# Altium PCB Доска.PcbDoc
Units mm, origin at the board's own origin, x right, y up, seen from the top; angles counter-clockwise.
Board outline 100 x 75.25 mm, 2 copper layers (Top Layer, Bottom Layer); 23 components, 17 nets, 145 pads, 0 vias.
Unrouted connection lines stored in the file: 31.
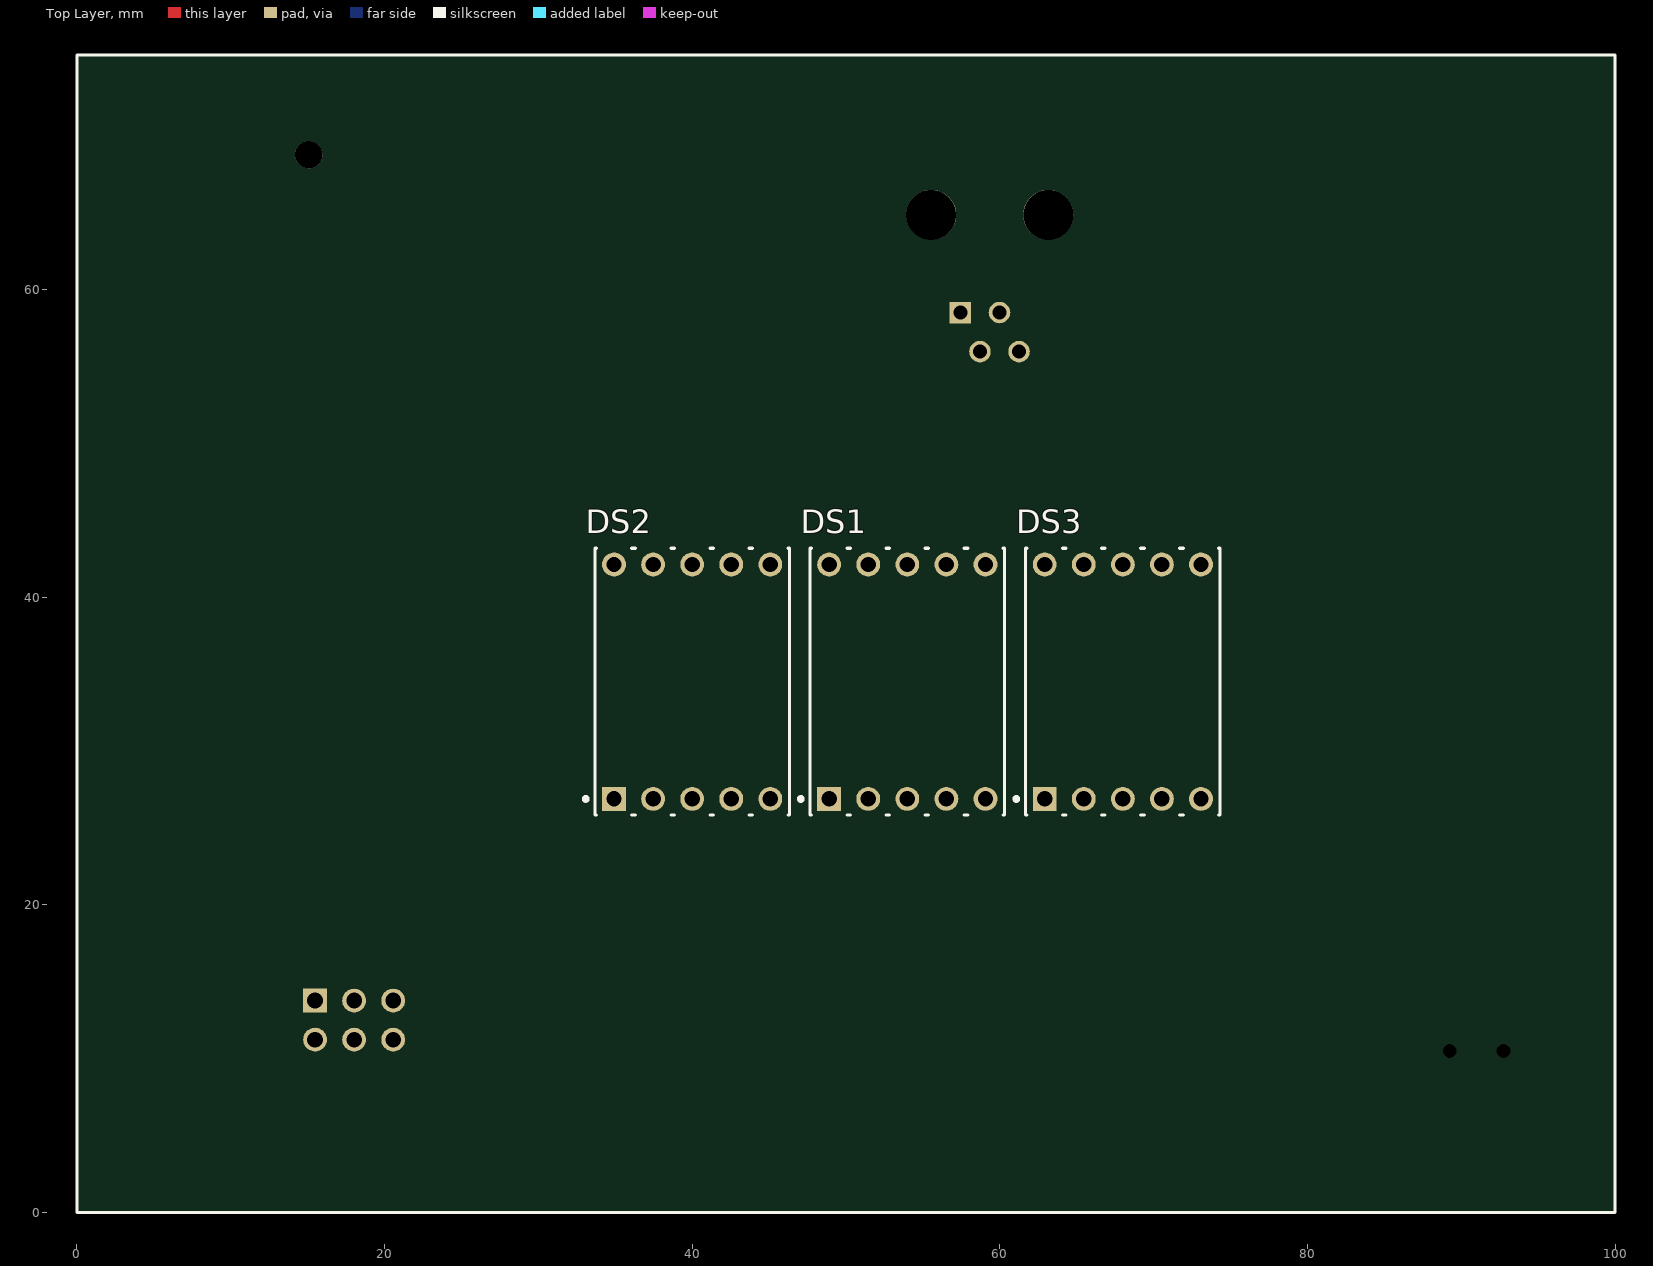
[diagram p0: Top Layer view]
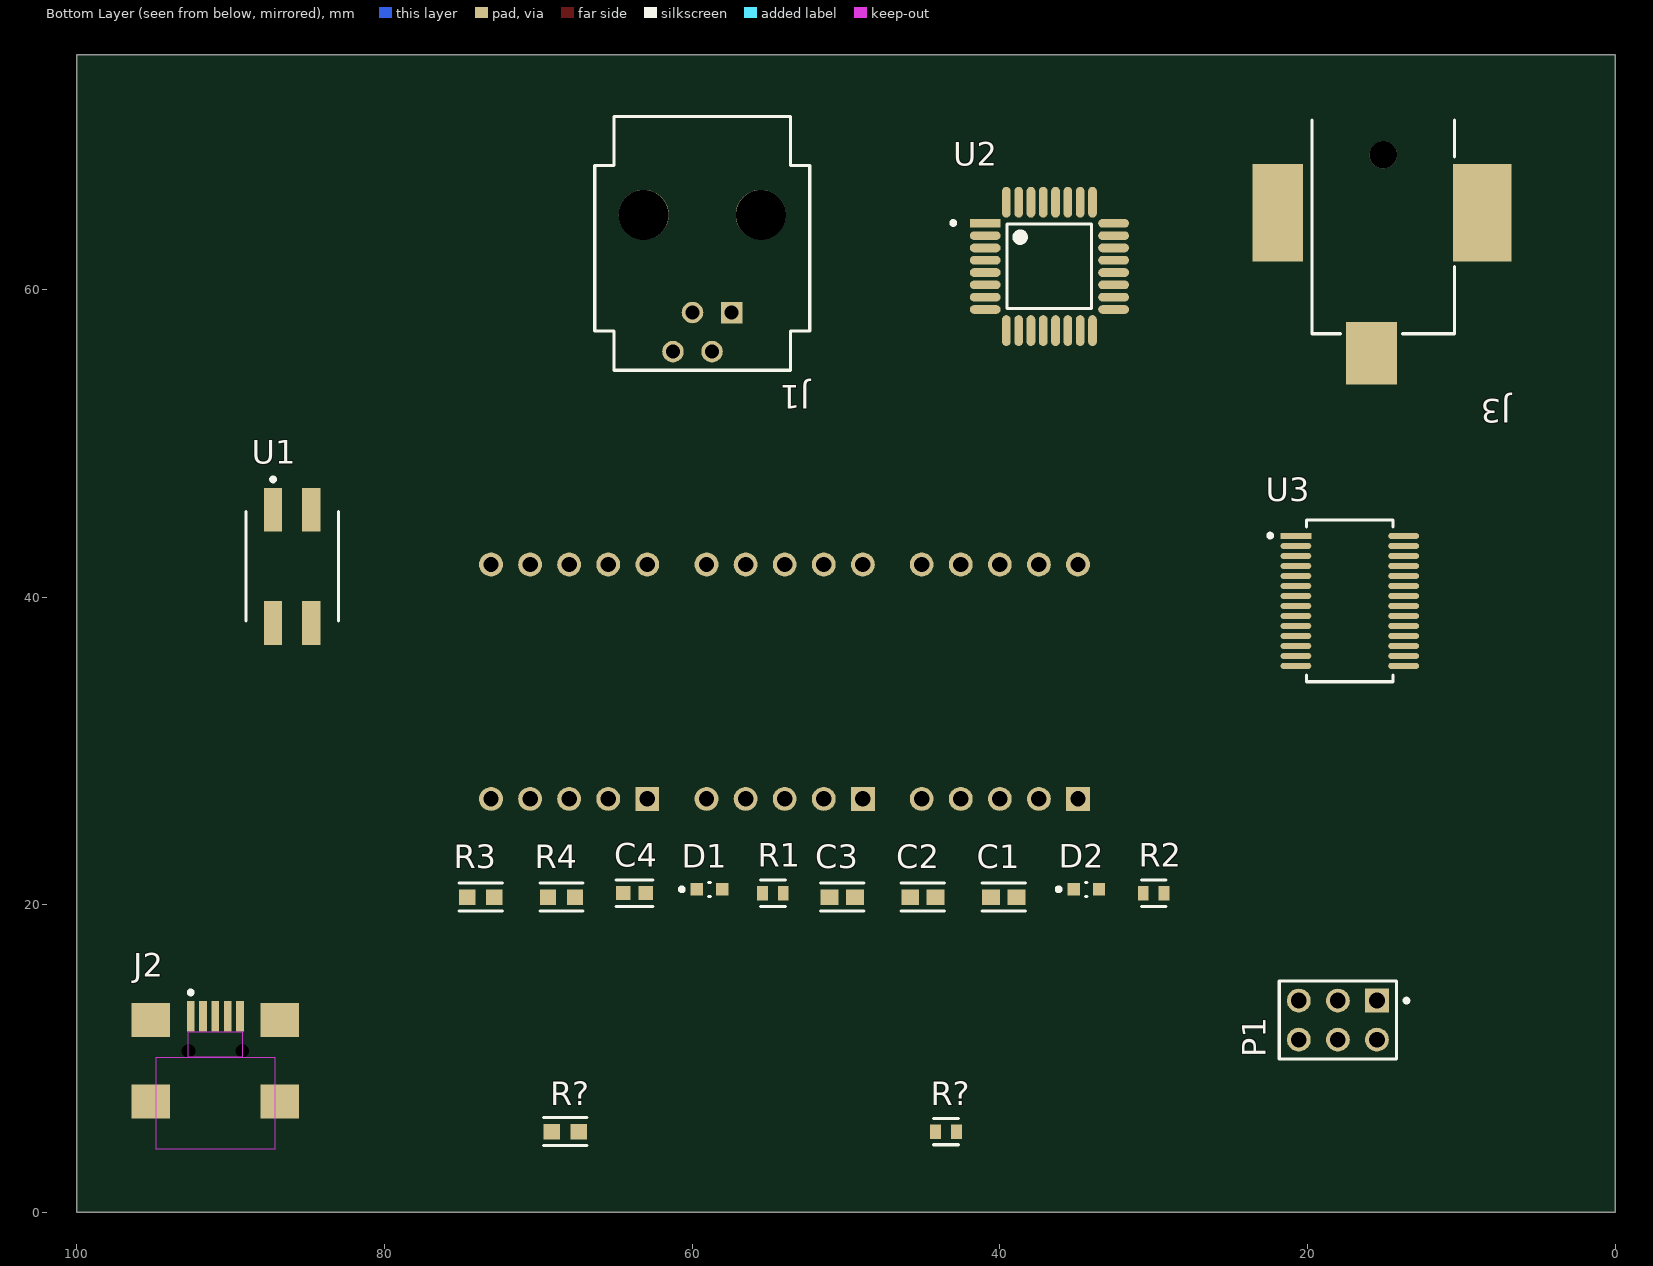
[diagram p1: Bottom Layer view, seen from below]

## Layer stack, top to bottom
Top Solder: solder mask 0.0102, Solder Resist, Dk 3.5
Top Layer: signal copper 0.0356
Dielectric 1: dielectric 0.32, FR-4, Dk 4.8
Bottom Layer: signal copper 0.0356
Bottom Solder: solder mask 0.0102, Solder Resist, Dk 3.5

## Board outline
0,0 0,75.25 100,75.25 100,0

## Design rules (kind name [scope] priority, off if disabled: settings)
Clearance [All] p1: gap=0.254 ignorepadtopadclearanceinfootprint=FALSE except(0: Arc-Hole Track-Hole SMDPad-Hole THPad-Hole Via-Hole Fill-Hole Poly-Hole Region-Hole Text-Hole)
ComponentClearance [All] p1: gap=0.1 collisioncheckmode=3 verticalgap=2540 showdistances=TRUE
PolygonConnect [All] p1: connectstyle=Relief reliefconductorwidth=0.254 reliefentries=4 polygonreliefangle="90 Angle" airgapwidth=0.254
RoutingVias [All] p1: holewidth=0.711 width=1.27 viastyle="Through Hole" minholewidth=0.711 minwidth=1.27 maxholewidth=0.711 maxwidth=1.27
SilkToSilkClearance [All] p1: silktosilkclearance=0.1
SolderMaskExpansion [All] p1: expansion=0.102 istentingtop=FALSE
Width [All] p1: maxlimit=0.254 minlimit=0.254 preferedwidth=0.254
28 further rules are at their usual default settings.

## Classes and differential pairs
component class Блок7: DS3
component class Блок6: DS2
component class Блок5: DS1
component class Блок3: U2
component class Блок2: U1
component class Архитектура: J1 J2 J3 P1
component class Блок1: C1 C2 C3 C4 D1 D2 R1 R2 R3 R4 R? U3

## Components (designator, comment, footprint, x,y, rotation, side; value= is the part's Value field where it differs from the comment)
C1 "CL10B225KP8NFNC" FP-CL10-IPC_A 39.75,20.5 r180 bottom
C2 "CL10B225KP8NFNC" FP-CL10-IPC_A 45,20.5 r180 bottom
C3 "CL10B225KP8NFNC" FP-CL10-IPC_A 50.25,20.5 r180 bottom
C4 "CL10B104JO8NNND" FP-CL10-IPC_B 63.75,20.75 r180 bottom
D1 "APT1608ZGCK" FP-APT1608ZGCK-MFG 58.875,21 r180 bottom
D2 "APT1608ZGCK" FP-APT1608ZGCK-MFG 34.375,21 r180 bottom
DS1 "LSHD-5601" FP-LSHD-5601-MFG 53.986,34.5 r0 top
DS2 "LSHD-5601" FP-LSHD-5601-MFG 40,34.5 r0 top
DS3 "LSHD-5601" FP-LSHD-5601-MFG 67.997,34.5 r0 top
J1 "615004144021" 615004144021 59.345,63 r0 bottom
J2 "UX60-MB-5ST" HIRO-UX60-MB-5ST_V 91,10.5 r180 bottom
J3 "RASM722PTR13X" FP-RASM722PTR13X-MFG 15.075,64.5 r0 bottom
P1 "TSW-103-08-L-D" SMTC-TSW-103-08-L-D_V 18.025,12.5 r0 bottom
R1 "MCT06030C4701FP500" FP-MCT0603-MFG 54.75,20.75 r180 bottom
R2 "MCT06030C4701FP500" FP-MCT0603-MFG 30,20.75 r180 bottom
R3 "RT0603FRE07100RL" FP-RT0603-IPC_A 73.75,20.5 r180 bottom value=100Ω
R4 "RT0603FRE07100RL" FP-RT0603-IPC_A 68.5,20.5 r180 bottom value=100Ω
R? "MCT06030C4701FP500" FP-MCT0603-MFG 43.5,5.25 r180 bottom
R? "RT0603FRE07100RL" FP-RT0603-IPC_A 68.25,5.25 r180 bottom value=100Ω
U1 "B82790S513N201" EPCO-B82790S513N201-4_V 86,42 r180 bottom
U2 "ATmega328P-AU" FP-32A-IPC_A 36.777,61.5 r180 bottom
U3 "FT232RL-REEL" FP-SSOP-28-MFG 17.25,39.75 r180 bottom
ZBOAS282495383 "Слой 1" "BOASVIEWlayer:Top Layer:1:1:1:1" 63.75,2421.5 r0 top (schematic designator fewf)

## Footprints (in the part's own frame and the unit in brackets; to place one, negate y for a bottom-side part, rotate by r counter-clockwise, add the part's x,y. Pads: shape width x height; smd on the part's side, far side on the other; paste and mask are expansions set on the pad)
615004144021 [mm] "Modular Jack Vertical Plastic 4P4C with Ears"
  rect 1.4x1.4 hole 0.9: 1(-1.905,4.5)
  round 1.4 hole 0.9: 2(-0.635,7.04) 3(0.635,4.5) 4(1.905,7.04)
  round 3.25 hole 3.25 unplated: MH1(-3.81,-1.85) MH2(3.81,-1.85)
  silkscreen extent -6.99,-8.25 6.99,8.25, body extent -6.98,-8.25 6.99,8.25, height 16.44
"BOASVIEWlayer:Top Layer:1:1:1:1" [mm]
EPCO-B82790S513N201-4_V [mm] "SMD, 4-Leads, Body 7.1x6mm"
  rect 1.2x2.85 smd: 1(-1.25,3.675) 2(-1.25,-3.675) 3(1.25,-3.675) 4(1.25,3.675)
  silkscreen extent -3,-3.55 3,5.77, body extent -3,-3.55 3,3.55, height 5.2
FP-32A-IPC_A [mm]
  rect 2.004x0.566 smd paste+0 mask+0: 1(-4.175,2.8)
  rrect100% 2.004x0.566 smd paste+0 mask+0: 2(-4.175,2) 3(-4.175,1.2) 4(-4.175,0.4) 5(-4.175,-0.4) 6(-4.175,-1.2) 7(-4.175,-2) 8(-4.175,-2.8) 17(4.175,-2.8) 18(4.175,-2) 19(4.175,-1.2) 20(4.175,-0.4) 21(4.175,0.4) 22(4.175,1.2) 23(4.175,2) 24(4.175,2.8)
  rrect100% 0.566x2.004 smd paste+0 mask+0: 9(-2.8,-4.175) 10(-2,-4.175) 11(-1.2,-4.175) 12(-0.4,-4.175) 13(0.4,-4.175) 14(1.2,-4.175) 15(2,-4.175) 16(2.8,-4.175) 25(2.8,4.175) 26(2,4.175) 27(1.2,4.175) 28(0.4,4.175) 29(-0.4,4.175) 30(-1.2,4.175) 31(-2,4.175) 32(-2.8,4.175)
  silkscreen extent -6.38,-2.75 2.75,2.95, body extent -4.51,-4.51 4.51,4.51, height 1.2
FP-APT1608ZGCK-MFG [mm]
  rect 0.8x0.8 smd paste+0 mask+0: 1(-0.825,0) 2(0.825,0)
  silkscreen extent -1.92,-0.45 0.05,0.45, body extent -0.8,-0.4 0.8,0.4, height 0.85
FP-CL10-IPC_A [mm]
  rect 1.158x1.012 smd paste+0 mask+0: 1(-0.827,0) 2(0.827,0)
  silkscreen extent -1.41,-0.91 1.41,0.91, body extent -0.8,-0.4 0.8,0.4, height 0.9
FP-CL10-IPC_B [mm]
  rect 0.958x0.912 smd paste+0 mask+0: 1(-0.727,0) 2(0.727,0)
  silkscreen extent -1.21,-0.86 1.21,0.86, body extent -0.8,-0.4 0.8,0.4, height 0.9
FP-LSHD-5601-MFG [mm]
  rect 1.55x1.55 hole 1 paste-1000 mask+0: 1(-5.08,-7.62)
  round 1.55 hole 1 paste-1000 mask+0: 2(-2.54,-7.62) 3(0,-7.62) 4(2.54,-7.62) 5(5.08,-7.62) 6(5.08,7.62) 7(2.54,7.62) 8(0,7.62) 9(-2.54,7.62) 10(-5.08,7.62)
  silkscreen extent -7.05,-8.67 6.32,8.67, body extent -6.43,-8.77 6.43,8.77, height 0.25
FP-MCT0603-MFG [mm]
  rect 0.7x0.95 smd paste+0 mask+0: 1(-0.675,0) 2(0.675,0)
  silkscreen extent -0.8,-0.85 0.8,0.85, body extent -0.77,-0.43 0.77,0.43, height 0.55
FP-RASM722PTR13X-MFG [mm]
  rect 3.3x4.06 smd paste+0 mask+0: 1(0.76,8.65)
  rect 3.81x6.35 smd paste+0 mask+0: 2(-6.43,-0.49)
  rect 3.3x6.35 smd paste+0 mask+0: 3(6.86,-0.49)
  round 1.78 hole 1.78 unplated paste-1000 mask+0: ""(0,-4.25)
  silkscreen extent -4.63,-6.5 4.63,7.38, body extent -7.6,-7.25 7.6,9.65, height 11
FP-RT0603-IPC_A [mm]
  rect 1.059x1.012 smd paste+0 mask+0: 1(-0.877,0) 2(0.877,0)
  silkscreen extent -1.41,-0.91 1.41,0.91, body extent -0.76,-0.4 0.84,0.4, height 0.58
FP-SSOP-28-MFG [mm]
  rect 2x0.4 smd paste+0 mask+0: 1(-3.5,4.225)
  rrect100% 2x0.4 smd paste+0 mask+0: 2(-3.5,3.575) 3(-3.5,2.925) 4(-3.5,2.275) 5(-3.5,1.625) 6(-3.5,0.975) 7(-3.5,0.325) 8(-3.5,-0.325) 9(-3.5,-0.975) 10(-3.5,-1.625) 11(-3.5,-2.275) 12(-3.5,-2.925) 13(-3.5,-3.575) 14(-3.5,-4.225) 15(3.5,-4.225) 16(3.5,-3.575) 17(3.5,-2.925) 18(3.5,-2.275) 19(3.5,-1.625) 20(3.5,-0.975) 21(3.5,-0.325) 22(3.5,0.325) 23(3.5,0.975) 24(3.5,1.625) 25(3.5,2.275) 26(3.5,2.925) 27(3.5,3.575) 28(3.5,4.225)
  silkscreen extent -5.3,-5.25 2.8,5.25, body extent -3.9,-5.1 3.9,5.1, height 2
HIRO-UX60-MB-5ST_V [mm] "SMD, 5-Leads, Body 7.7x9mm, Pitch 0.8mm"
  rect 0.5x2 smd: 1(-1.6,2.25) 2(-0.8,2.25) 3(0,2.25) 4(0.8,2.25) 5(1.6,2.25)
  rect 2.5x2.2 smd: 6(-4.2,2) 7(4.2,2) 8(-4.2,-3.3) 9(4.2,-3.3)
  round 0.6 hole 0.9 unplated: 10(-1.75,0) 11(1.75,0)
  Top Layer keep-out region: -1.75,1.25 1.75,1.25 1.75,-0.4 -1.75,-0.4
  Top Layer keep-out region: -3.85,-0.4 3.85,-0.4 3.85,-6.4 -3.85,-6.4
  silkscreen extent -1.73,3.68 -1.48,3.92, body extent -4.95,-6.4 4.95,2.6, height 4.6
SMTC-TSW-103-08-L-D_V [mm] "CONN, 6-Leads, Body 7.62x5.08mm, Pitch 2.54mm"
  rect 1.55x1.55 hole 1.02: 1(-2.54,-1.27)
  round 1.55 hole 1.02: 2(-2.54,1.27) 3(0,-1.27) 4(0,1.27) 5(2.54,-1.27) 6(2.54,1.27)
  silkscreen extent -4.58,-2.54 3.81,2.54, body extent -3.81,-2.54 3.81,2.54, height 8.38

## Part data
C1 C2 C3: library part CMP-13271-000561-1, "Cap Ceramic 2.2uF 10V X7R ±10% Pad SMD 0603 +125°C T/R", Capacitance=2.2uF, Case Code (Imperial)=0603, Case Code (Metric)=1608, Dielectric=X7R, Max Operating Temperature=125°C, Min Operating Temperature=-55°C, Package Quantity=1, Tolerance=10%, Voltage Rating=10V, Case/Package=0603, Depth=0.8mm, Height=0.8mm, Length=0.063inch, Mount="Surface Mount", Packaging="Tape and Reel", Radiation Hardening=No, Thickness=0.035inch, Width=0.031inch
C4: library part CMP-13271-003283-1, "Cap Ceramic 100nF 16V X7R ±5% Pad SMD 0603 +125°C T/R", Capacitance=100nF, Case/Package=0603, Dielectric=X7R, Max Operating Temperature=125°C, Min Operating Temperature=-55°C, Package Quantity=10000, Tolerance=5%, Voltage Rating=16V, Depth=0.8mm, Height=0.8mm, Lead Free="Lead Free", Length=1.6mm, Material=Ceramic, Mount="Surface Mount", Packaging="Tape and Reel", Radiation Hardening=No, Thickness=0.035inch, Voltage Rating (DC)=16V, Width=0.031inch
D1 D2: library part CMP-44529-000024-1, "LED GREEN CLEAR CHIP SMD", Case Code (Imperial)=0603, Case Code (Metric)=1608, Color=Green, Forward Current=20mA, Forward Voltage=3.3V, Lens Color=Colorless, Max Operating Temperature=85°C, Min Operating Temperature=-40°C, Package Quantity=1, Case/Package=0603, Dominant Wavelength=525nm, Height=0.75mm, Illumination Color=Green, Lead Free="Lead Free", Length=1.6mm, Lens Transparency=Clear, Luminous Intensity=350mcd, Mount="Surface Mount", Packaging="Tape and Reel", Test Current=20mA, Viewing Angle=120°, Width=0.8mm
DS1 DS2 DS3: library part CMP-22013-000002-1, "LED 7-SEG .56\" GREEN 565NM CA", Forward Current=20mA, Forward Voltage=2.1V, Manufacturer=Lite-On, Reverse Voltage=5V, Temperature="-35°C to +105°C", Temperature Range High=+105°C, Temperature Range Low=-35°C, Automotive=No, Category=Disp, ComponentLink2Description=Datasheet, ComponentLink2URL=https://media.digikey.com/pdf/Data%20Sheets/Lite-On%20PDFs/LSHD-5601.pdf, Device Class L1=Optoelectronics, Device Class L2=Displays, Device Class L3="LED Displays", Digikey Description="LED 7-SEG .56\" GREEN 565NM CA", Display Type=LED, Element Config="Common Anode", Height=8.25mm, Lead Free=Yes, Luminous Intensity=2.4mcd, Manufacturer Part Number=LSHD-5601, Mouser Description="LED Displays & Accessories Green, Low Current 0.56, CARHD", Octopart=https://octopart.com/lshd-5601-lite-on-548440, Package=LSHD-5601, RoHS=TRUE, Test Current=20mA, Wavelength=569nm
J1: library part CMP-1502-01721-1, "Modular Jack WR-MJ, Plastic, with Panel Stop, Vertical Entry, THT, 4P4C", Contact Resistance=20mOhm, Manufacturer="Wurth Elektronik", Operating Temperature=-40to85degC, Rated Current=1.5A, Withstanding Voltage=1000VAC, Working Voltage=120VAC, Compliance=Leadfree/RoHS, Datasheet URL=https://katalog.we-online.de/em/datasheet/615004144021.pdf, Entrance=Vertical, Manufacturer URL=http://www.we-online.de, Mounting Technology=THT, Package Reference=615004144021, Packaging=Tray, Part Number=615004144021, Pin Number=4P4C, Port=1x1, Publisher=WurthElektronik, Цена="10 руб"
J2: library part CMP-2000-07375-1, "USB Connector Mini B Type, 1 A, 5 V AC, -30 to 75 degC, 5-Pin SMD, RoHS, Tape and Reel", Manufacturer="Hirose Electric", Package Description="5-Pin Surface Mount Device, Body 7.7 x 9 mm, Pitch 0.8 mm", Datasheet URL=http://datasheet.octopart.com/UX60-MB-5ST-Hirose-datasheet-8329595.pdf, Datasheet Version=04/2008, Manufacturer URL=https://www.hirose.com, Mounting Technology=SurfaceMount, No of Positions=5, Package Reference=UX60-MB-5ST, Parameter 1="USB Connector Mini B Type", Pitch=0.8mm, Style/Orientation=RightAngleSocket/Receptacle, Termination=SurfaceMount, Type=WiretoBoard
J3: library part CMP-47995-000002-1, "CONN PWR JACK 2.1X5.5MM SOLDER", Case/Package=SMD/SMT, Color=Black, Current Rating=5A, Package Quantity=120, Connector Type=Jack, Contact Material="Copper Alloy", Contact Plating=Tin, Gender=Male, Housing Color=Black, Housing Material=Thermoplastic, Mount="Surface Mount", Shielding=Unshielded, Termination=Solder
P1: library part CMP-1024-00336-5, "Male Header, Pitch 2.54 mm, 2 x 3 Position, Height 8.38 mm, Tail Length 5.08 mm, -55 to 125 degC, RoHS, Bulk", Manufacturer=Samtec, Max Operating Temperature="125 degC", Min Operating Temperature="-55 degC", ComponentLink1Description="Manufacturer URL", ComponentLink1URL=http://www.samtec.com/, ComponentLink2Description=Datasheet, ComponentLink2URL=https://datasheet.ciiva.com/25618/0900766b81154476-25618436.pdf, ComponentLink3Description="Package Specification", ComponentLink3URL=http://suddendocs.samtec.com/prints/tsw-xxx-xx-x-x-xx-xxx-footprint.pdf, DatasheetVersion=04/2012, Mount="Through Hole", Mounting Technology="Through Hole", PackageDescription="Male Header, Pitch 2.54 mm, 2 x 3 Position, Height 8.38 mm, Tail Length 5.08 mm", PackageReference=TSW-103-08-L-D, Parameter 1="Разъем программатора", Parameter 2="для внутрисхемного прошивания", Parameter 3="процессора, тип ICSP", Pitch="2.54 mm", RoHSCompliant=true
R1 R2 R?: library part CMP-02407-001733-1, "RES SMD 100 OHM 1% 1/8W 0603", Case Code (Imperial)=0603, Case Code (Metric)=1608, Max Operating Temperature=125°C, Max Power Dissipation=125mW, Min Operating Temperature=-55°C, Package Quantity=1, Resistance=4.7kR, Temperature Coefficient=50ppm/°C, Tolerance=1%, Voltage Rating=75V, Case/Package=0603, Composition="Thin Film", Contact Plating=Tin, Depth=0.85mm, Height=0.022inch, Lead Free="Lead Free", Length=1.55mm, Military Standard=Not, Mount="Surface Mount", Number of Terminations=2, Packaging="Tape and Reel", Power Rating=125mW, Radiation Hardening=No, REACH SVHC="No SVHC", Voltage Rating (DC)=75V, Width=0.033inch
R3 R4 R?: library part CMP-03412-022806-1, "RES SMD 100 OHM 1% 1/10W 0603", Manufacturer=Yageo, Package=0603, Power Rating=0.1W, Resistance=100Ω, Temperature="-55°C to +155°C", Temperature Coefficient="50 ppm/°C", Temperature Range High=+155°C, Temperature Range Low=-55°C, Tolerance=0.01, Voltage Rating=75V, Automotive=No, Category=Res, ComponentLink2Description=Datasheet, ComponentLink2URL=http://www.yageo.com/documents/recent/PYu-RT_1-to-0.01_RoHS_L_9.pdf, Composition="Thin Film", Device Class L1="Passive Components", Device Class L2=Resistors, Device Class L3="Chip SMD Resistors", Digikey Description="RES SMD 100 OHM 1% 1/10W 0603", Footprint Url=http://www.yageo.com/exep/pages/download/literatures/PYu-R_Mount_10.pdf, Height=0.55mm, Ipc Land Pattern Name=RESC16080X45, Lead Free=Yes, Manufacturer Part Number=RT0603FRE07100RL, Mouser Description="Thin Film Resistors - SMD 1/10W 100 ohm 1% 50ppm", Octopart=https://octopart.com/rt0603fre07100rl-yageo-39792638, RoHS=TRUE, Series=RT
U1: library part CMP-2000-05103-1, "Data and Signal Line Choke, 42 VAC, 80 VDC, 0.2 to 1 A, 4-Pin SMD, RoHS, Tape and Reel", Current=500mA, DC Resistance (DCR)=140mOhm, Inductance=51µH, Manufacturer=EPCOS, Operating Temperature=-40degC~125degC, Package / Case=Horizontal,4GullWing, Standard Package=1, Catalog Drawings="B82790C0,S0Side /  / B82790S0513N201Top", Category=Filters, Datasheet URL=https://datasheet.ciiva.com/29348/501837-da-01-en-entstoerdrosseln-b82790-s513-n201-29348745.pdf, Datasheet Version=Apr-08, Dynamic Catalog=B82790Series, Family=CommonModeChokes, Filter Type=Data,SignalLine, Height (Max)="0.205\"(5.20mm)", Impedance=-, Manufacturer URL=http://www.epcos.com, Mounting Type=SurfaceMount, Number of Lines=2, Other Names=495-1868-6, Packaging=Digi-Reel, Series=-, Size / Dimension="0.280\"Lx0.236\"W(7.10mmx6.00mm)"
U2: library part CMP-06276-000013-1, "IC MCU 8BIT 32KB FLASH 32TQFP", Frequency=20MHz, Manufacturer=Microchip, Max Supply Voltage=5.5V, Min Supply Voltage=1.8V, Nominal Supply Current=0.04-5.2mA, Package=32A, Temperature="-40°C to +85°C", Temperature Range High=+85°C, Temperature Range Low=-40°C, Automotive=No, Category=IC, ComponentLink2Description=Datasheet, ComponentLink2URL=http://ww1.microchip.com/downloads/en/DeviceDoc/ATmega48A-PA-88A-PA-168A-PA-328-P-DS-DS40002061A.pdf, Core Architecture=AVR, Data Bus Width=8bits, Device Class L1="Integrated Circuits (ICs)", Device Class L2="Embedded Processors and Controllers", Device Class L3=Microcontrollers, Digikey Description="IC MCU 8BIT 32KB FLASH 32TQFP", Footprint Url=http://ww1.microchip.com/downloads/en/appnotes/atmel-8826-seeprom-pcb-mounting-guidelines-surface-mount-packages-applicationnote.pdf, Height=1.2mm, Interface=I2C,SPI,UART,USART,2-Wire, Ipc Land Pattern Name=QFP80P900X900X120-32, Lead Free=Yes, Manufacturer Part Number=ATmega328P-AU, Memory Size=32KBytes, Memory Type=FLASH, Mouser Description="ATmega Series 32 KB Flash 2 KB SRAM 20 MHz 8-Bit Microcontroller - TQFP-32", Number Of A/D Converters=1, Number Of Adc Channels=8, Number Of Cores=1, Number Of I2C Channels=1, Number Of I/Os=23, Number Of Pwm Channels=6, Number Of Spi Channels=1, Number Of Timers/Counters=3, Number Of Uart Channels=1, Octopart=https://octopart.com/atmega328p-au-microchip-77760215, Ram Size=2KBytes, RoHS=TRUE, Standoff Height=0.05mm
U3: library part CMP-0078-00029-4, "IC USB FS SERIAL UART 28-SSOP", Case/Package=SSOP, Max Operating Temperature=85°C, Max Supply Voltage=5.25V, Min Operating Temperature=-40°C, Min Supply Voltage=3.3V, Operating Supply Current=15mA, Package Quantity=2000, Voltage=5V, Data Rate=12Mbps, Height=1.75mm, Interface=UART, Lead Free="Lead Free", Length=10.2mm, Mount="Surface Mount", Number Of Channels=1, Number of Pins=28, Number of Transceivers=1, Packaging="Tape and Reel", Radiation Hardening=No, REACH SVHC="No SVHC", Weight=0.080001oz, Width=5.3mm

## Nets (pads, with @x,y where several pads share a name; then routed paths per layer and width w, separated by ;. In a path a pad name is that pad's centre, name@x,y a point inside that pad or via, vN(x,y) a via of type N, cw(c..) or ccw(c..) an arc to the next point about the centre after c; other vN are vias at no path point)
GND.0V0: C1.2 C2.2 C3.2 J2.5 R?.1@44.175,5.25 U3.7 U3.18 U3.21 U3.25
NetC3_1: C3.1 U3.17
NetC4_1: C4.1 U3.2
NetD1_1: D1.1 R1.1
NetD2_1: D2.1 R2.1
NetR1_2: R1.2 U3.22
NetR2_2: R2.2 U3.13
NetR3_1: R3.1 U3.1
NetR4_1: R4.1 U3.5
NetR?_1: R?.1@69.126,5.25 U3.3
PWR.5V0: C1.1 C2.1 D1.2 D2.2 J2.1 U3.4 U3.19 U3.20
RESET: C4.2 R?.2@67.373,5.25
RXD: R4.2
SHLD: J2.6 J2.7 J2.8 J2.9 R?.2@42.825,5.25
TXD: R3.2
USBDM: J2.2 U3.16
USBDP: J2.3 U3.15
pads on no net: DS1.1 DS1.2 DS1.3 DS1.4 DS1.5 DS1.6 DS1.7 DS1.8 DS1.9 DS1.10 DS2.1 DS2.2 DS2.3 DS2.4 DS2.5 DS2.6 DS2.7 DS2.8 DS2.9 DS2.10 DS3.1 DS3.2 DS3.3 DS3.4 DS3.5 DS3.6 DS3.7 DS3.8 DS3.9 DS3.10 J1.1 J1.2 J1.3 J1.4 J1.MH1 J1.MH2 J2.4 J2.10 J2.11 J3. J3.1 J3.2 J3.3 P1.1 P1.2 P1.3 P1.4 P1.5 P1.6 U1.1 U1.2 U1.3 U1.4 U2.1 U2.2 U2.3 U2.4 U2.5 U2.6 U2.7 U2.8 U2.9 U2.10 U2.11 U2.12 U2.13 U2.14 U2.15 U2.16 U2.17 U2.18 U2.19 U2.20 U2.21 U2.22 U2.23 U2.24 U2.25 U2.26 U2.27 U2.28 U2.29 U2.30 U2.31 U2.32 U3.6 U3.8 U3.9 U3.10 U3.11 U3.12 U3.14 U3.23 U3.24 U3.26 U3.27 U3.28

## Silkscreen, mask and mechanical layers (free items; w line width, h text height)
Top Overlay:
  the board outline again, w0.2
Bottom Assembly:
  text "BOASFORMAT|А4|1|0|883070867|82677165|1000000000|1:1|" at 0,2540 h0
  text "SET2|Superlayer=MechanicalLayer7|Wsuperlayer=MechanicalLayer8|Layergrid=MechanicalLayer9|Werase=MechanicalLayer11|Layermark=MechanicalLayer12|Layerstamp=MechanicalLayer13|Thinline=0,18|Basicline=0,6|Gridline=0,18|Boardline=0,6|Contourpolygonline=0,6|PcbGridStep=1|PcbGridCleareanceAtView=0|PcbGridNumberEach=l4|PcbGridLineEach=l2|PcbGridCountSecondaryStrip=1|PcbGridEnabledStrip=True|PcbSignalGridEnabled=True|PcbSignalShowBukva=True|RealSignalLayerNames=False|PcbGridEnabledBothSide=False|PcbPolarGridEnabled=False|PcbPolarGridAngleStep=10|PcbPolarGridRadialStep=10|PcbPolarGridCenterPcbGrid=False|SilkShowPad=True|SilkViewName=Слой маркировки|SilkShowHole=True|SilkShowAxis=True|SilkShowBukva=True|SilkShowGrid=False|SolderShowGrid=False|SolderViewName=Слой маски|SolderShowAxis=False|SolderShowBukva=False|MainViewShowGrid=False|MainViewUseShapesDrill=False|ShowBukvaOnSboky=True|Density=2,2|TableName=Таблица 1|RazrezWidth=100|RealLayerNames=False|RazrezShowBukva=False|RazrezBukva=В-В|Sher=Rz 160|Asstoplayer=MechanicalLayer1|Asstoplayer2=None|Assbottomlayer=MechanicalLayer2|Assbottomlayer2=None|AssMinDiameterHoles=2|AssDim=False|AssMech=False|AssSilk=False|AssComponentSilk=False|AssFreeSilk=False|AssSmdPads=False|AssGridEnable=False|Mirror=Horisontal|PcbGridFontSize=5|PcbGridCenterZero=False|TTStampDistance=12|MainFontSize=5|PolyShtrihEnable=True|PolyStep=2|PcbDrillDrawingGridEnabled=False|PcbDrillDrawingViewName=Слой сверловки|PcbDrillDrawingShowBukva=False|PcbDrillDrawingShowAxis=False|PcbSignalLayersUseDrill=False|PcbSignalLayersUseShapesDrill=False|PcbSignalLayersShowAxis=False" at 0,0.025 h0
  text "BOASVIADRILLTABLE:" at 0,0 h0
  text "2BOASDRILLTABLE:none,354331,Нет,2,False,|none,354331,Да,4,True,|none,393701,Да,30,True,|none,401575,Да,6,True,|none,700787,Нет,1,False,|none,1279528,Нет,2,False," at 0,0 h0
Mechanical 13:
  lines w0.18: 20,2253 85,2253 ; 20,2258 85,2258 ; 20,2263 85,2263 ; 20,2268 85,2268 ; 20,2273 85,2273 ; 20,2288 85,2288 ; 20,2293 85,2293 ; 20,2298 85,2298 ; 159.96,2268 159.96,2283 ; 164.98,2268 164.98,2283 ; 181.7,2522.1 184.8,2516.7 190.4,2526.5
  lines w0.6: 8,2273 20,2273 ; 8,2308 20,2308 ; 8,2333 20,2333 ; 8,2358 20,2358 ; 8,2475 20,2475 ; 13,2248 13,2393 ; 13,2415 13,2535 ; 20,2278 85,2278 ; 20,2283 85,2283 ; 20,2393 8,2393 8,2248 20,2248 ; 20,2415 8,2415 8,2535 20,2535 ; 20,2521 90,2521 90,2535 ; 27,2278 27,2303 ; 37,2248 37,2303 ; 60,2248 60,2303 ; 75,2248 75,2303 ; 85,2248 85,2303 205,2303 ; 85,2263 155,2263 205,2263 ; 85,2288 205,2288 ; 134,2524 139,2515 146.6,2529 ; 146.7,2529 197,2529 ; 155,2248 155,2288 ; 155,2268 205,2268 ; 155,2283 170,2283 205,2283 ; 170,2268 170,2288 ; 175.57,2263 175.57,2268 ; 187,2268 187,2288 ; 205,2311 205,2303 ; 20,2248 20,2303 205,2303 ; 20,2248 205,2248 205,2535 20,2535 ; 20,2248 20,2535
  text "Rz 160" at 146.7,2516.7 h10.75
  text "(" at 178,2516.7 h10.75
  text ")" at 189,2516.7 h10.75
  text "Перв. примен." at 12.038,2494.979 h5.38 r90
  text "Справ. №" at 12.038,2437.504 h5.38 r90
  text "Подп. и дата" at 12.038,2365.571 h5.38 r90
  text "Инв. № дубл." at 12.038,2336.086 h5.38 r90
  text "Взам. инв. №" at 12.038,2311.108 h5.38 r90
  text "Лит." at 159.194,2283.962 h5.38
  text "Масса" at 173.916,2283.962 h5.38
  text "Масштаб" at 188.836,2283.962 h5.38
  text "Подп. и дата" at 12.038,2281.071 h5.38 r90
  text "Изм." at 20.569,2278.962 h5.38
  text "Лист" at 27.858,2278.962 h5.38
  text "№ докум." at 42,2278.962 h5.38
  text "Подп." at 63.773,2278.962 h5.38
  text "Дата" at 75.793,2278.962 h5.38
  text "Разраб." at 20.533,2273.771 h5.38
  text "7 г" at 175.368,2273.303 h7.68
  text "1:1" at 193.729,2273.303 h7.68
  text "Пров." at 20.533,2268.771 h5.38
  text "Т.контр." at 20.533,2263.771 h5.38
  text "Лист" at 156.442,2263.771 h5.38
  text "Листов" at 177.485,2263.771 h5.38
  text "1" at 197.4,2263.771 h5.38
  text "Н.контр." at 20.533,2253.771 h5.38
  text "Инв. № подл." at 12.038,2251.086 h5.38 r90
  text "Утв." at 20.533,2248.771 h5.38
  text "Копировал" at 95.533,2243.771 h5.38
  text "Формат А4" at 176.404,2243.771 h5.38

## Text inside footprints (layer, text, board x,y; h text height)
ZBOAS282495383: Bottom Assembly "100" at 160.181,2415 h7.68; Bottom Assembly "96" at 157.162,2415 h7.68; Bottom Assembly "92" at 152.974,2415 h7.68; Bottom Assembly "88" at 148.842,2415 h7.68; Bottom Assembly "84" at 145.18,2415 h7.68; Bottom Assembly "80" at 140.764,2415 h7.68; Bottom Assembly "76" at 137.319,2415 h7.68; Bottom Assembly "72" at 133.13,2415 h7.68; Bottom Assembly "68" at 128.842,2415 h7.68; Bottom Assembly "64" at 125.18,2415 h7.68; Bottom Assembly "60" at 120.764,2415 h7.68; Bottom Assembly "56" at 117.006,2415 h7.68; Bottom Assembly "52" at 112.817,2415 h7.68; Bottom Assembly "48" at 108.888,2415 h7.68; Bottom Assembly "44" at 105.226,2415 h7.68; Bottom Assembly "40" at 100.81,2415 h7.68; Bottom Assembly "36" at 97.006,2415 h7.68; Bottom Assembly "32" at 92.817,2415 h7.68; Bottom Assembly "28" at 88.728,2415 h7.68; Bottom Assembly "24" at 85.066,2415 h7.68; Bottom Assembly "20" at 80.65,2415 h7.68; Bottom Assembly "16" at 77.791,2415 h7.68; Bottom Assembly "12" at 73.603,2415 h7.68; Bottom Assembly "8" at 70.253,2415 h7.68; Bottom Assembly "4" at 66.637,2415 h7.68; Bottom Assembly "0" at 62.175,2415 h7.68; Bottom Assembly "72" at 54.51,2491.303 h7.68; Bottom Assembly "68" at 53.934,2487.303 h7.68; Bottom Assembly "64" at 54.61,2483.303 h7.68; Bottom Assembly "60" at 53.778,2479.303 h7.68; Bottom Assembly "56" at 54.261,2475.303 h7.68; Bottom Assembly "52" at 53.885,2471.303 h7.68; Bottom Assembly "48" at 54.027,2467.303 h7.68; Bottom Assembly "44" at 54.702,2463.303 h7.68; Bottom Assembly "40" at 53.87,2459.303 h7.68; Bottom Assembly "36" at 54.261,2455.303 h7.68; Bottom Assembly "32" at 53.885,2451.303 h7.68; Bottom Assembly "28" at 53.707,2447.303 h7.68; Bottom Assembly "24" at 54.382,2443.303 h7.68; Bottom Assembly "20" at 53.551,2439.303 h7.68; Bottom Assembly "16" at 55.833,2435.303 h7.68; Bottom Assembly "12" at 55.456,2431.303 h7.68; Bottom Assembly "8" at 56.757,2427.303 h7.68; Bottom Assembly "4" at 57.525,2423.303 h7.68; Bottom Assembly "0" at 56.601,2419.303 h7.68